# Altium PCB Project.PcbDoc
Units mil, origin at the board's own origin, x right, y up, seen from the top; angles counter-clockwise.
Board outline 5875 x 3940 mil, 2 copper layers (Top Layer, Bottom Layer); 65 components, 62 nets, 293 pads, 34 vias.
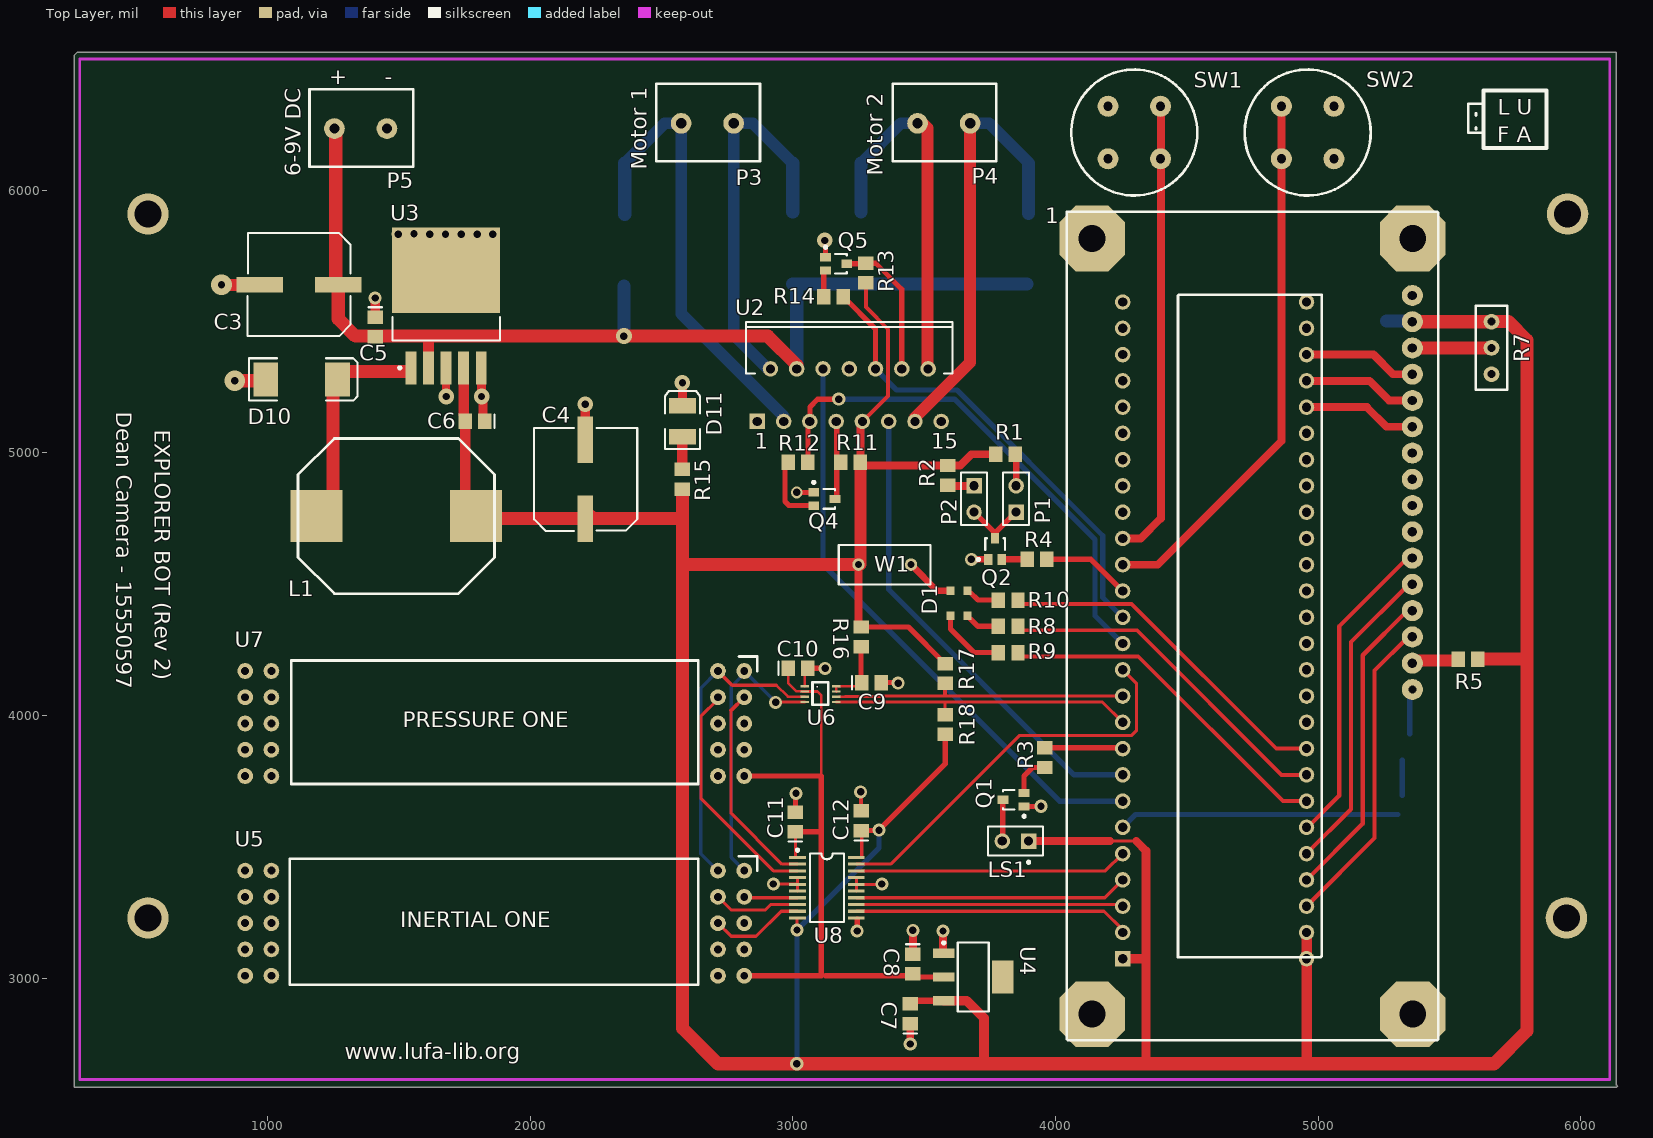
[diagram p0: Top Layer view]
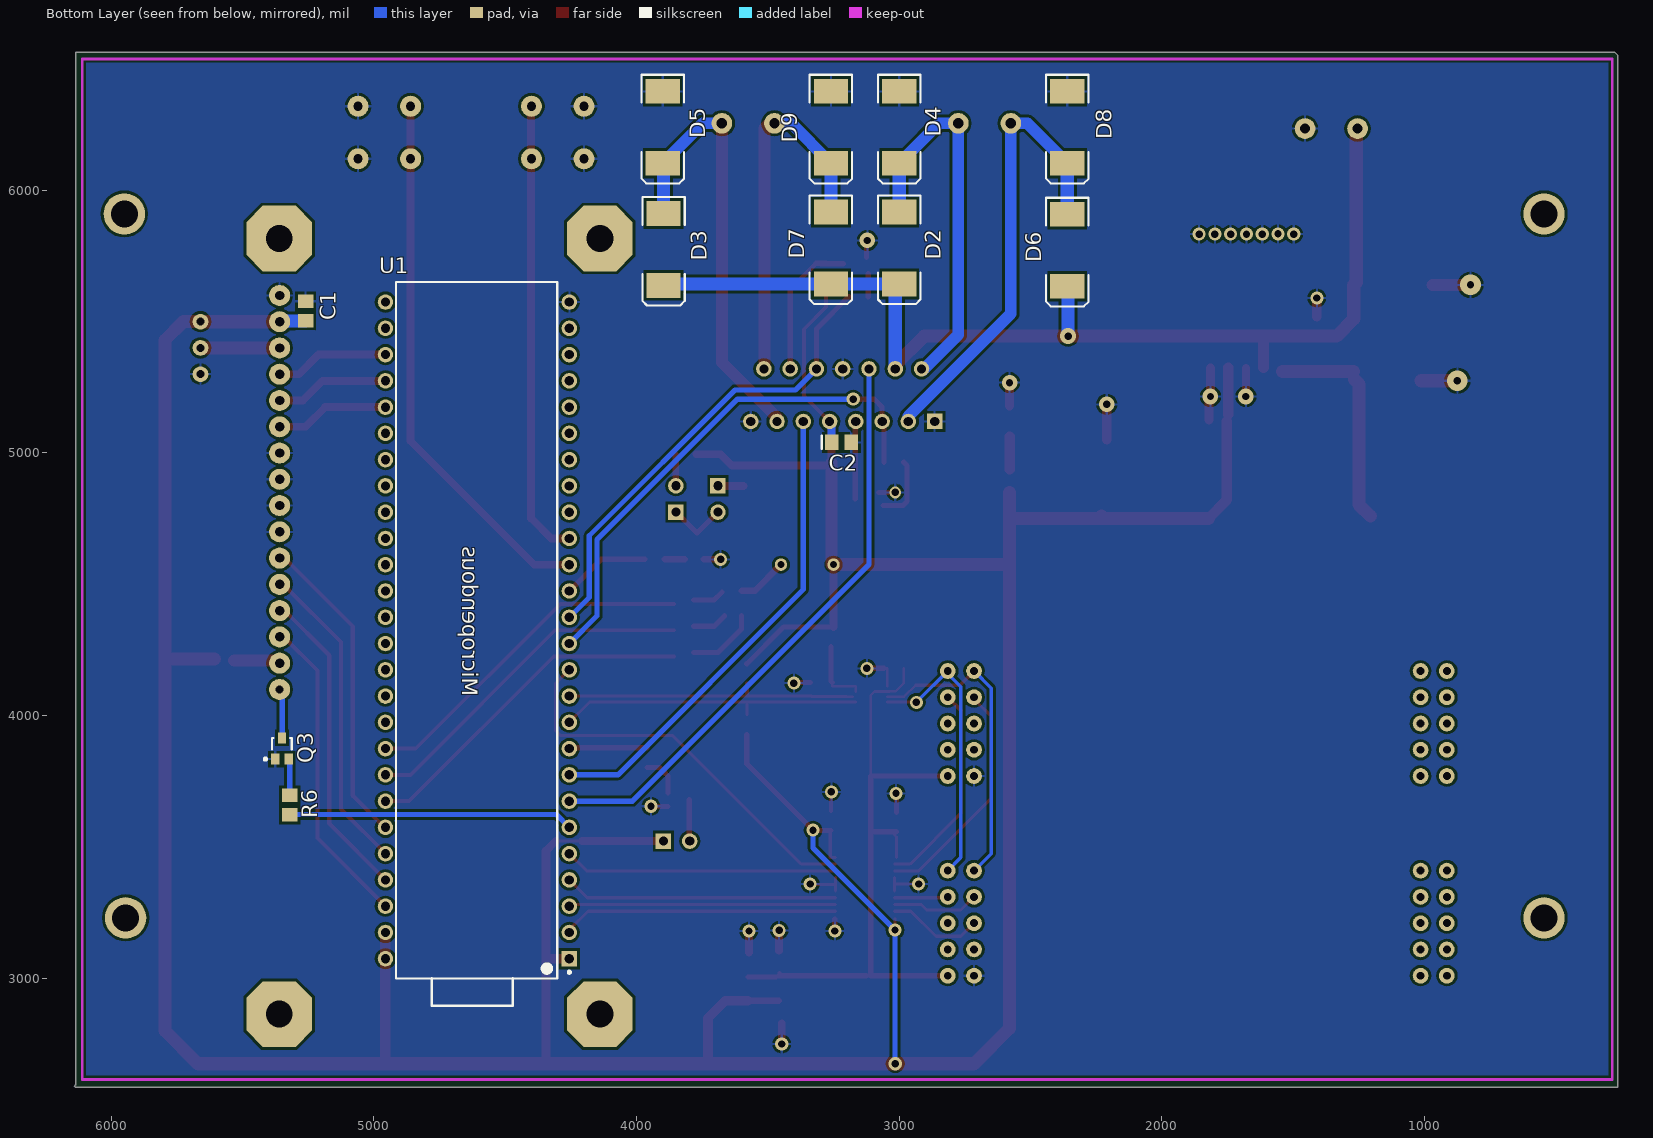
[diagram p1: Bottom Layer view, seen from below]

## Layer stack, top to bottom
Top Layer: signal copper 1.4
Dielectric: dielectric 12.6, FR-4, Dk 4.8
Bottom Layer: signal copper 1.4

## Board outline
265,6515 275,6525 6135,6525 6135,2595 6140,2590 6135,2585 265,2585

## Design rules (kind name [scope] priority, off if disabled: settings)
Clearance [All] p1: gap=10
MinimumSolderMaskSliver [All] p1 off: minsoldermaskwidth=10
PlaneClearance [All] p1: clearance=30
PolygonConnect [All] p1: connectstyle=Relief reliefconductorwidth=10 reliefentries=4 polygonreliefangle="90 Angle"
RoutingVias [All] p1: holewidth=28 width=50 viastyle="Through Hole" minholewidth=28 minwidth=50 maxholewidth=28 maxwidth=50
SilkToSilkClearance [All] p1 off: silktosilkclearance=10
SilkscreenOverComponentPads [All] p1 off: minsilkscreentomaskgap=10
SolderMaskExpansion [All] p1: expansion=4
Width [All] p1: maxlimit=50 minlimit=10 preferedwidth=10
24 further rules are at their usual default settings.

## Classes and differential pairs
component class "System Control": 1 C1 D1 LS1 P1 P2 Q1 Q2 Q3 R1 R2 R3 R4 R5 R6 R7 R8 R9 R10 R? SW1 SW2 SW? U1 W1
component class "Sensor Modules": C9 C10 C11 C12 R16 R17 R18 U5 U6 U7 U8 U9
component class "Power Management": C3 C4 C5 C6 C7 C8 D10 D11 L1 L3 P5 R15 U3 U4
component class "Motor Control": C2 D2 D3 D4 D5 D6 D7 D8 D9 P3 P4 Q4 Q5 R11 R12 R13 R14 U2

## Components (designator, comment, footprint, x,y, rotation, side; value= is the part's Value field where it differs from the comment)
1 "LCD" LCD_PADS 4750,4340 r270 top
C1 "" 2012[0805] 5260,5540 r90 bottom
C2 "" 0805 3220,5040 r180 bottom
C3 "Cap Pol1" "Cap F" 1120,5640 r0 top
C4 "Cap Pol1" "Cap F" 2210,4900 r270 top
C5 "Cap Semi" C0805 1410,5480 r270 top
C6 "Cap Semi" C0805 1790,5120 r180 top
C7 "Cap Semi" C0805 3447,2865 r90 top
C8 "Cap Semi" C0805 3457,3055 r270 top
C9 "" 0805 3300,4126 r0 top
C10 "" 0805 3020,4180 r0 top
C11 "" 0805 3010,3595 r90 top
C12 "" 0805 3260,3600 r90 top
D1 "KAA-3528EMBSGC" KAA-3528EMBSGC 3600,4380 r90 top
D2 "MBRS340T3G" SMC 3000,5780 r270 bottom
D3 "MBRS340T3G" SMC 3897,5775 r270 bottom
D4 "MBRS340T3G" SMC 3000,6240 r270 bottom
D5 "MBRS340T3G" SMC 3900,6240 r270 bottom
D6 "MBRS340T3G" SMC 2360,5771.78 r270 bottom
D7 "MBRS340T3G" SMC 3260,5780 r270 bottom
D8 "MBRS340T3G" SMC 2360,6240 r270 bottom
D9 "MBRS340T3G" SMC 3260,6240 r270 bottom
D10 "MBRS340T3G" SMC 1130,5280 r0 top
D11 "LED3" DSO-C2/D5.6 2580,5120 r90 top
L1 "" inductor_epcos 1490,4760 r0 top
LS1 "Speaker" PIN2 3897.5,3522.5 r180 top
P1 "Header 2" HDR1X2 3850,4775 r90 top
P2 "Header 2" HDR1X2 3690,4875 r270 top
P3 "Motor L" "PCB Screw Connector" 2800,6280 r180 top
P4 "Motor R" "PCB Screw Connector" 3700,6280 r180 top
P5 "Battery" "PCB Screw Connector" 1480,6260 r180 top
Q1 "15C01M-TL-E" SOT323 3840,3680 r90 top
Q2 "15C01M-TL-E" SOT323 3770,4635 r0 top
Q3 "15C01M-TL-E" SOT323 5350,3875 r180 bottom
Q4 "15C01M-TL-E" SOT323 3120,4825 r270 top
Q5 "15C01M-TL-E" SOT323 3165,5720 r270 top
R1 "Res Semi" 2012[0805] 3810,4995 r180 top
R2 "Res Semi" 2012[0805] 3590,4915 r90 top
R3 "Res Semi" 2012[0805] 3960,3840 r270 top
R4 "Res Semi" 2012[0805] 3930,4595 r180 top
R5 "" 2012[0805] 5570,4215 r0 top
R6 "Res Semi" 2012[0805] 5320,3660 r90 bottom
R7 "" POT1 5660,5400 r90 top
R8 "Res Semi" 2012[0805] 3820,4340 r180 top
R9 "Res Semi" 2012[0805] 3820,4240 r180 top
R10 "Res Semi" 2012[0805] 3820,4440 r180 top
R11 "Res Semi" 2012[0805] 3220,4965 r0 top
R12 "Res Semi" 2012[0805] 3020,4965 r0 top
R13 "Res Semi" 2012[0805] 3278,5685 r270 top
R14 "Res Semi" 2012[0805] 3155,5595 r0 top
R15 "Res Semi" 2012[0805] 2580,4900 r270 top
R16 "Res Semi" 2012[0805] 3260,4300 r90 top
R17 "Res Semi" 2012[0805] 3580,4160 r90 top
R18 "Res Semi" 2012[0805] 3580,3966 r270 top
SW1 "PB4" PB2x2 4300,6220 r270 top
SW2 "PB4" PB2x2 4960,6220 r90 top
U1 "Micropendous-4" Micropendous-4 4020,3080 r0 bottom
U2 "L298N" Multiwatt15V 3215,5220 r0 top
U3 "LM2595S-5.0" TS5B_N 1680,5560 r90 top
U4 "ADP3338" SOT223-4l 3687,3005 r0 top
U5 "INTERTIAL-ONE" ATMEL-SENS 2690,3410 r270 top
U6 "PCA9306" us8 3190,4112 r270 top
U7 "PRESSURE-ONE" ATMEL-SENS 2690,4170 r270 top
U8 "ADG3308" TSSOP20 3130,3345 r270 top
W1 "Jumper" RAD-0.2 3350,4575 r180 top

## Footprints (in the part's own frame and the unit in brackets; to place one, negate y for a bottom-side part, rotate by r counter-clockwise, add the part's x,y. Pads: shape width x height; smd on the part's side, far side on the other; paste and mask are expansions set on the pad)
0805 [mm] "Chip Capacitor; Body 2.0 x 1.2 mm (LxW typ)"
  rect 1.3x1.5 smd: 1(-0.95,0) 2(0.95,0)
  silkscreen extent -1.9,-0.65 -1.9,0.65
2012[0805] [mm] "Chip Resistor; Body 2.0 x 1.3 mm (LxW typ)"
  rect 1.3x1.5 smd: 1(-0.95,0) 2(0.95,0)
ATMEL-SENS [mil]
  round 60 hole 30: 1(0,25) 2(0,125) 3(100,25) 4(100,125) 5(200,25) 6(200,125) 7(300,25) 8(300,125) 9(400,25) 10(400,125) 11(0,-1775) 12(0,-1675) 13(100,-1775) 14(100,-1675) 15(200,-1775) 16(200,-1675) 17(300,-1775) 18(300,-1675) 19(400,-1775) 20(400,-1675)
  silkscreen extent -55,105 0,175, body extent -55,-1825 445,175, height 787
C0805 [mm] "Chip Capacitor; Body 2.0 x 1.2 mm (LxW typ)"
  rect 1.3x1.5 smd: 1(-0.95,0) 2(0.95,0)
  silkscreen extent -1.9,-0.65 -1.9,0.65
"Cap F" [mm]
  rect 4.5x1.5 smd: 1(3.8,0) 2(-3.8,0)
  silkscreen extent -4.97,-4.95 5,5.02
DSO-C2/D5.6 [mm] "SM LED; 2 C-Bend Leads; Body 3.5 x 2.8 x 1.9 mm, inc leads (LxWxH typ)"
  rect 1.5x2.6 smd: 1(-1.5,0) 2(1.5,0)
  silkscreen extent -2.65,-1.7 2.95,1.7
HDR1X2 [mm] "Connector; Header; 2 Position"
  rect 1.5x1.5 hole 0.9: 1(0,0)
  round 1.5 hole 0.9: 2(2.54,0)
  silkscreen extent -1.27,-1.27 3.81,1.27
inductor_epcos [mm] "330uH, 1.O Amp DC (Max) Power Inductor"
  rect 5x5 smd: 1(-7.712,0) 2(7.713,0)
  silkscreen extent -9.49,-7.5 9.51,7.5
KAA-3528EMBSGC [mm]
  rect 0.8x0.75 smd: 1(2.413,-1.651) 2(2.413,0) 3(0,0) 4(0,-1.651)
  body extent -0.38,-2.54 2.79,0.89, height 3
LCD_PADS [mm]
  round 2.032 hole 0.9: 1(-32,15.46) 2(-29.459,15.46) 3(-26.919,15.46) 4(-24.379,15.46) 5(-21.839,15.46) 6(-19.299,15.46) 7(-16.759,15.46) 8(-14.219,15.46) 9(-11.679,15.46) 10(-9.139,15.46) 11(-6.599,15.46) 12(-4.059,15.46) 13(-1.519,15.46) 14(1.021,15.46) 15(3.561,15.46)
  round 2.032 hole 0.762: 16(6.101,15.46)
  oct 6.35x6.35 hole 2.6: ""(-37.5,-15.5) ""(-37.5,15.5) ""(37.5,-15.5) ""(37.5,15.5)
  silkscreen extent -40.08,-17.97 40.01,17.97
Micropendous-4 [mm]
  rect 1.5x1.5 hole 0.9: 1(5.988,0.138)
  round 1.5 hole 0.9: 2(5.988,-2.402) 3(5.988,-4.942) 4(5.988,-7.482) 5(5.988,-10.022) 6(5.988,-12.562) 7(5.988,-15.102) 8(5.988,-17.642) 9(5.988,-20.182) 10(5.988,-22.722) 11(5.988,-25.262) 12(5.988,-27.802) 13(5.988,-30.342) 14(5.988,-32.882) 15(5.988,-35.422) 16(5.988,-37.962) 17(5.988,-40.502) 18(5.988,-43.042) 19(5.988,-45.582) 20(5.988,-48.122) 21(5.988,-50.662) 22(5.988,-53.202) 23(5.988,-55.742) 24(5.988,-58.282) 25(5.988,-60.822) 26(5.988,-63.362) 27(23.768,-63.362) 28(23.768,-60.822) 29(23.768,-58.282) 30(23.768,-55.742) 31(23.768,-53.202) 32(23.768,-50.662) 33(23.768,-48.122) 34(23.768,-45.582) 35(23.768,-43.042) 36(23.768,-40.502) 37(23.768,-37.962) 38(23.768,-35.422) 39(23.768,-32.882) 40(23.768,-30.342) 41(23.768,-27.802) 42(23.768,-25.262) 43(23.768,-22.722) 44(23.768,-20.182) 45(23.768,-17.642) 46(23.768,-15.102) 47(23.768,-12.562) 48(23.768,-10.022) 49(23.768,-7.482) 50(23.768,-4.942) 51(23.768,-2.402) 52(23.768,0.138)
  silkscreen extent 5.86,-65.31 22.73,2.03, body extent 6.18,-65.26 23.49,2.04, height 4.45
Multiwatt15V [mm] "TO, Thru-Hole, Vertical, Heatsink Mounted; 15 Bent Staggered Leads; Pitch 1.27 mm"
  rect 1.5x1.5 hole 0.9: 1(-8.89,-2.54)
  round 1.5 hole 0.9: 2(-7.62,2.54) 3(-6.35,-2.54) 4(-5.08,2.54) 5(-3.81,-2.54) 6(-2.54,2.54) 7(-1.27,-2.54) 8(0,2.54) 9(1.27,-2.54) 10(2.54,2.54) 11(3.81,-2.54) 12(5.08,2.54) 13(6.35,-2.54) 14(7.62,2.54) 15(8.89,-2.54)
  silkscreen extent -10,2.09 10,7.09
PB2x2 [mil]
  round 80 hole 35: 1(100,100) 2(-100,100) 3(-100,-100) 4(100,-100)
  silkscreen extent -240,-240 240,240
"PCB Screw Connector" [mm]
  round 2 hole 1: 1(0.635,0.635) 2(5.715,0.635)
  silkscreen extent -1.91,-3.18 8.13,4.32
PIN2 [mm] "Photosensitive Diode; 2 Leads"
  rect 1.5x1.5 hole 0.9: 1(0,0)
  round 1.5 hole 0.9: 2(2.54,0)
  silkscreen extent -1.4,-1.4 3.94,2.17
POT1 [mil]
  round 60 hole 30: 1(-100,0) 2(100,0) 3(0,0)
  silkscreen extent -160,-60 160,60
RAD-0.2 [mm] "Radial Cap, Thru-Hole; 2 Leads; 0.2 in Pin Spacing"
  round 1.2 hole 0.7: 1(-2.54,0) 2(2.54,0)
  silkscreen extent -4.44,-1.91 4.44,1.91
SMC [mm]
  rect 2.4x3.3 smd: 1(-3.475,0) 2(3.475,0)
  silkscreen extent -5.07,-2.05 5.43,2.06
SOT223-4l [mm] "SOT223, 4-Leads, Body 6.5x3.5mm, Pitch 2.3mm, Lead Span 7mm, IPC High Density"
  rect 2.1x0.9 smd: 1(-2.85,2.3) 2(-2.85,0) 3(-2.85,-2.3)
  rect 2.1x3.2 smd: 4(2.85,0)
  silkscreen extent -2.97,-3.35 1.5,3.42, body extent -1.85,-3.35 1.85,3.35, height 1.7
SOT323 [mm] "SOT-323/SC-70; 3 Leads; Body 2.2 x 2.2 mm, inc. leads (LxW max)"
  rect 0.8x1.05 smd: 1(-0.65,-1.025) 2(0.65,-1.025) 3(0,1.025)
  silkscreen extent -1.72,-1.15 0.95,1.03
TS5B_N [mm] "D2-PAK, 6-Leads, Body 8.6x10.2mm, Pitch 1.7mm, Lead Span 14.1mm, IPC Medium Density"
  rect 3.2x1.05 smd: 1(-6,3.4) 2(-6,1.7) 3(-6,0) 4(-6,-1.7) 5(-6,-3.4)
  rect 8.3x10.45 smd: 6(3.45,0)
  silkscreen extent -6.12,-5.2 -1.1,5.2, body extent -3.35,-5.2 6.05,5.2, height 4.65
TSSOP20 [mm] "Shrink Small Outline; 20 Leads; Body Width 4.4 mm; Pitch 0.65 mm"
  rect 0.3x1.6 smd: 1(-2.925,-2.85) 2(-2.275,-2.85) 3(-1.625,-2.85) 4(-0.975,-2.85) 5(-0.325,-2.85) 6(0.325,-2.85) 7(0.975,-2.85) 8(1.625,-2.85) 9(2.275,-2.85) 10(2.925,-2.85) 11(2.925,2.85) 12(2.275,2.85) 13(1.625,2.85) 14(0.975,2.85) 15(0.325,2.85) 16(-0.325,2.85) 17(-0.975,2.85) 18(-1.625,2.85) 19(-2.275,2.85) 20(-2.925,2.85)
  silkscreen extent -3.75,-2.97 3.3,1.65
us8 [mm]
  rect 0.21x0.8 smd: 1(0,-3.683) 2(0.508,-3.683) 3(1.016,-3.683) 4(1.524,-3.683) 5(1.524,-0.635) 6(1.016,-0.635) 7(0.508,-0.635) 8(0,-0.635)
  silkscreen extent -0.38,-2.92 1.78,-1.4

## Part data
C1 C2 C9 C10 C11 C12: library part "Cap Semi", "Capacitor (Semiconductor SIM Model)"
C3 C4: "Polarized Capacitor (Radial)"
C5 C6 C7 C8: "Capacitor (Semiconductor SIM Model)"
D1: library part S1204RGBSDJC, "Ultra-Bright RGB Tri-color LED Lamp, 4-Lead 1204-size SMD"
D2 D3 D4 D5 D6 D7 D8 D9 D10: library part "D Schottky", "Schottky Diode"
D11: "Typical BLUE SiC LED"
L1: library part Inductor, "Inductor"
LS1: "Loudspeaker"
P1 P2: "Header, 2-Pin"
P3 P4 P5: library part "Header 2", "Header, 2-Pin"
Q1 Q2 Q3 Q4 Q5: library part 2N3904, "NPN General Purpose Amplifier"
R1 R2 R3 R4 R6 R8 R9 R10 R11 R12 R13 R14 R15 R16 R17 R18: "Semiconductor Resistor"
R5: library part Res1, "Resistor"
R7: library part RPot, "Potentiometer"
U2: "Dual Full Bridge Driver"
U3: "SIMPLE SWITCHER Power Converter 150 KHz 1A Step-Down Voltage Regulator"
W1: "Jumper Wire"

## Free pads (board coordinates)
  round 157.48 hole 102.36: 1(545,3230) 1(545,5910) 1(5945,3230) 1(5950,5910)

## Via types
v1: diameter 50, hole 28, Top Layer to Bottom Layer, 25 vias
v2: diameter 59.06, hole 28, Top Layer to Bottom Layer, 5 vias
v3: diameter 78.74, hole 28, Top Layer to Bottom Layer, 2 vias
v4: diameter 45, hole 28, Top Layer to Bottom Layer, 1 vias
v5: diameter 60, hole 28, Top Layer to Bottom Layer, 1 vias

## Nets (pads, with @x,y where several pads share a name; then routed paths per layer and width w, separated by ;. In a path a pad name is that pad's centre, name@x,y a point inside that pad or via, vN(x,y) a via of type N, cw(c..) or ccw(c..) an arc to the next point about the centre after c; other vN are vias at no path point)
3.3V: C8.2 C10.1 C11.1 U4.2 U5.10 U6.2 U7.10 U8.1 | length 2514.2
  Top Layer w10: C10.1 2982.6,4124.4 3014.13,4092.87 3035.85,4092.87 3036.72,4092 3094,4092 3108,4078 3108,3770 ; U6.2@3053.28,4092 U6.2@3054.15,4092.87
  Top Layer w12: U8.1@3010,3460 3010,3537.6 C11.1@3017.8,3545.39
  Top Layer w14: U7.10@2815,3750 U7.10@2835,3770 ; C8.2 3452.2,3017.6 3454.6,3020 C8.2@3457,3020
  Top Layer w16: U5.10 U5.10@2830,3010
  Top Layer w20: U5.10 3108,3010 3108,3557.6 ; U7.10@2835,3770 3108,3770 3108,3557.6 ; C11.1 3108,3557.6 ; 3124,3010 C8.2@3457,3010 ; C8.2@3469.6,3005 U4.2
5V: 1.2 C1.1 C2.1 C4.1 C6.2 C7.2 C12.1 L1.2 LS1.1 R1.2 R2.2 R5.2 R7.2 R11.2 R13.2 R15.2 R16.2 R17.2 R18.2 U1.1 U1.51 U1.52 U2.9 U3.4 U4.3 U8.10 U8.20 W1.2 | length 17175.3
  Top Layer w12: v1(3016,3184) U8.10@3016,3228.05 ; U8.20 3262.6,3460.16 C12.1@3262.6,3560 ; 4207.5,3522.5 4307.5,3522.5
  Top Layer w15: U2.9 3362.03,5217.03 3362.03,5470.97 3278,5555 R13.2
  Top Layer w20: R16.2@3250,4337.4 3440,4337.4 R17.2 ; C12.1 v1@3326.6,3562.6 ; v1(3327.98,3563.98) 3580,3816 R18.2
  Top Layer w25: C7.2@3459.05,2914.45 U4.3
  Top Layer w30: R16.2@3250,4337.4 W1.2 ; R11.2 U2.9@3257.4,5112.4 ; R11.2@3270,4952.4 3637.4,4952.4 3680,4995 R1.2 ; LS1.1 4207.5,3522.5 ; 4307.5,3522.5 4345,3485
  Top Layer w35: U4.3 3662.55,2914.45 ; U1.1 4345,3074.57 ; 4345,2675 4345,3074.57 ; 4345,3485 4345,3074.57
  Top Layer w37: 3662.55,2914.45 3728,2849 3728,2675
  Top Layer w40: C6.2@1746.93,5148.07 U3.4 ; C6.2 1752.6,4821.04 L1.2@1823.64,4750 ; 2570,4747.8 2580,4747.8 ; 4955.75,2675.75 U1.52 U1.51
  Top Layer w45: W1.2@3257.4,4575 R11.2
  Top Layer w50: L1.2@1823.64,4750 2220,4750 C4.1@2230,4760 ; C4.1@2230,4750.39 2580,4750.39 ; R15.2@2580,4850 2580,4750.39 ; W1.2 2580,4575 ; 1.2@5365.91,5492.56 1.2 R7.2@5660,5499.8 ; R5.2 5795,4215 ; R7.2 5725,5500 5795,5430 5795,4215 ; 2580,4575 2580,4747.8 2580,4750.39 ; 2580,4575 2580,2810 2715,2675 v1(3015,2675) 3728,2675 4345,2675 5670,2675 5795,2800 5795,4215
  Bottom Layer w15: v1(3015,2675) v1@3016,2676
  Bottom Layer w20: v1@3016,2676 v1(3016,3184) 3327.98,3495.98 v1(3327.98,3563.98)
  Bottom Layer w30: C2.1 U2.9@3257.4,5112.4
  Bottom Layer w50: C1.1 1.2@5355.87,5502.6
GND: 1.1 1.7 1.8 1.9 1.10 C1.2 C2.2 C3.2 C4.2 C5.1 C6.1 C7.1 C8.1 C9.2 C10.2 C11.2 C12.2 D4.1 D5.1 D8.1 D9.1 D10.1 D11.2 P5.1 Q1.1 Q2.1 Q3.1 Q4.1 Q5.1 R7.1 SW1.3 SW1.4 SW2.3 SW2.4 U1.26 U2.1 U2.8 U2.15 U3.3 U3.5 U3.6 U4.1 U5.9 U6.1 U7.9 U8.4 U8.5 U8.6 U8.11 U8.15 U8.16 U8.17 | length 2043.4
  Top Layer w10: U6.1 C10.2@3045,4180
  Top Layer w12: v1(2926,3359) U8.5@3016.59,3359 ; U8.6 U8.5 U8.4 ; U8.15 U8.16 ; U8.17 U8.16 ; v1@3339,3357.8 U8.16
  Top Layer w15: C12.2 v1@3260,3708
  Top Layer w20: v1@3003,3703.4 3003,3695 3010,3688 C11.2 ; v4(3015,4850) Q4.1@3079.06,4850 ; C10.2 v1(3123,4180) ; Q5.1 v2@3124.65,5805.35 ; v1(3245,3180) U8.11@3245,3225.64 ; C9.2 v1@3399,4126 ; Q1.1 v1@3944.41,3654.41
  Top Layer w25: v1(3680,4595) Q2.1@3744.06,4595
  Top Layer w30: v2(1680,5215) U3.3 ; v1(3447,2750) C7.1 ; C8.1@3457,3105 v1(3457,3182.6) ; U4.1@3572,3098.35 v1(3572,3180)
  Top Layer w35: C5.1 v1(1410,5590) ; v2@1815,5210 v2(1815,5215) U3.5@1815,5322.64 ; C6.1@1820,5125 v2@1820,5217.6 ; C4.2 v2(2210,5185) ; D11.2 v2(2580,5268)
  Top Layer w45: v3(825,5640) C3.2
  Top Layer w50: v3@890,5275 D10.1@1013.19,5275
  other v1: 3339,3359 3945,3655 3012,3704 3258,3710 3401,4124 1498,5833 1618,5833 1678,5833 1738,5833 1798,5833 1858,5833 1558,5834
  other v2: 3121,5809
  other v3: 875,5275
Net1_3: 1.3 R7.3 | length 301.1
  Top Layer w50: 1.3@5358.86,5400 R7.3
Net1_4: 1.4 U1.29 | length 433.9
  Top Layer w30: U1.29 5210.43,5374.57 5285.2,5299.8 1.4
Net1_5: 1.5 U1.30 | length 433.9
  Top Layer w30: U1.30 5195.43,5274.57 5270.2,5199.8 1.5
Net1_6: 1.6 U1.31 | length 433.9
  Top Layer w30: U1.31 5185.43,5174.57 5260.2,5099.8 1.6
Net1_11: 1.11 U1.47 | length 1204.3
  Top Layer w16: U1.47@4957.66,3572.66 5080,3695 5080,4340 5339.8,4599.8 1.11
Net1_12: 1.12 U1.48 | length 1200.2
  Top Layer w16: U1.48 5125,3643.82 5125,4280 5344.8,4499.8 1.12
Net1_13: 1.13 U1.49 | length 1203.2
  Top Layer w16: U1.49 5170,3588.82 5170,4230 5339.8,4399.8 1.13
Net1_14: 1.14 U1.50 | length 1201.4
  Top Layer w16: U1.50 5215,3533.82 5215,4172 5342.8,4299.8 1.14
Net1_15: 1.15 R5.1 | length 173.9
  Top Layer w45: 1.15@5358.66,4209.8 R5.1@5532.6,4209.8
Net1_16: 1.16 Q3.3 | length 337.8
  Bottom Layer w20: Q3.3@5348.66,3930.91 5348.66,4099.8 Q3.3@5348.66,3930.91
NetC9_1: C9.1 R16.1 U6.7 U6.8 | length 262.4
  Top Layer w10: U6.7 U6.8 3254.6,4112 C9.1@3254.6,4126
  Top Layer w20: C9.1@3254.6,4126 3260,4131.4 R16.1
NetD1_1: D1.1 R10.2 | length 120
  Top Layer w20: D1.1@3675,4470 3705,4440 R10.2
NetD1_2: D1.2 W1.1 | length 191.4
  Top Layer w25: W1.1 3550,4475 D1.2
NetD1_3: D1.3 R9.2 | length 269.9
  Top Layer w20: D1.3 3600,4330 3690,4240 R9.2
NetD1_4: D1.4 R8.2 | length 134.2
  Top Layer w20: D1.4 3705,4340 R8.2
NetD2_1: D2.1 D4.2 P3.1 U2.2 | length 1470.2
  Bottom Layer w45: U2.2@2910,5315 2775,5450 P3.1 2848.19,6255 D4.2
  Bottom Layer w50: D2.1 D4.2
NetD3_1: D3.1 D5.2 P4.1 U2.13 | length 1678.2
  Top Layer w45: U2.13 3465,5135 3675,5345 P4.1@3675,6235
  Bottom Layer w45: P4.1 3748.19,6255 D5.2
  Bottom Layer w50: D3.1 D5.2@3897,6100.19
NetD6_1: D6.1 D8.2 P3.2 U2.3 | length 1767.3
  Bottom Layer w35: U2.3 U2.3@2965,5140
  Bottom Layer w45: D8.2 2511.81,6255 2572,6255 2575,6252 2575,5530 U2.3@2965,5140
  Bottom Layer w50: D6.1 D8.2
NetD7_1: D7.1 D9.2 P4.2 U2.14 | length 1409.6
  Top Layer w45: P4.2@3495,6255 3513,6237 3513,5327 U2.14@3520,5320
  Bottom Layer w45: D9.2 3411.81,6255 P4.2
  Bottom Layer w50: D7.1 D9.2
NetD10_2: D10.2 L1.1 U3.1 | length 815
  Top Layer w50: L1.1@1206.36,4760 1250,4803.64 1250,5263.19 D10.2 ; D10.2@1270,5310 U3.1@1540,5310
NetD11_1: D11.1 R15.1 | length 123.5
  Top Layer w40: R15.1 D11.1
NetLS1_2: LS1.2 Q1.3 | length 158.4
  Top Layer w20: LS1.2 3799.65,3524.65 Q1.3
NetP1_1: P1.1 P2.2 Q2.3 | length 226.3
  Top Layer w20: P2.2 3770,4695 P1.1
NetP1_2: P1.2 R1.1 | length 117.4
  Top Layer w25: P1.2 R1.1@3850,4992.4
NetP2_1: P2.1 R2.1 | length 97.4
  Top Layer w30: R2.1@3592.6,4875 P2.1
NetQ1_2: Q1.2 R3.2 | length 157.8
  Top Layer w20: Q1.2 3880.35,3770.35 3912.6,3802.6 R3.2
NetQ2_2: Q2.2 R4.2 | length 76.7
  Top Layer w25: 3815.94,4595 R4.2
NetQ3_2: Q3.2 R6.2 | length 132.8
  Bottom Layer w20: R6.2 Q3.2@5320,3830.24
NetQ4_2: Q4.2 R12.1 | length 251.8
  Top Layer w20: R12.1 2970,4952.4 2970,4815 2985,4800 Q4.2@3060.35,4800
NetQ4_3: Q4.3 R11.1 U2.7 | length 295.9
  Top Layer w20: U2.7 3167.24,5117.76 3167.24,4965 Q4.3@3167.24,4825
NetQ5_2: Q5.2 R14.1 | length 87.7
  Top Layer w20: R14.1 3117.76,5595.16 Q5.2@3117.76,5682.6
NetQ5_3: Q5.3 R13.1 U2.12 | length 569.9
  Top Layer w20: Q5.3@3212.24,5720 R13.1@3297.6,5720 ; R13.1@3275.6,5720 R13.1 3315.6,5722.4 3415,5623 U2.12
NetR3_1: R3.1 U1.9 | length 296.9
  Top Layer w20: R3.1 4252.91,3877.4 U1.9
NetR4_1: R4.1 U1.15 | length 338.2
  Top Layer w20: R4.1 4135.31,4595 U1.15
NetR6_1: R6.1 U1.6 | length 1068.4
  Bottom Layer w19.68: U1.6 4305.12,3623.94 R6.1@5303.66,3623.94
NetR8_1: R8.1 U1.45 | length 1326.3
  Top Layer w15: R8.1@3857.4,4325 4310,4325 4860.43,3774.57 U1.45
NetR9_1: R9.1 U1.46 | length 1326.3
  Top Layer w15: R9.1@3857.4,4225 4315,4225 4865.43,3674.57 U1.46
NetR10_1: R10.1 U1.44 | length 1326.3
  Top Layer w15: R10.1@3857.4,4425 4290,4425 4840.43,3874.57 U1.44
NetR12_2: R12.2 U1.13 U2.5 | length 1971.4
  Top Layer w20: R12.2 3057.4,5112.4 U2.5 3065,5175 3095,5205 v1(3175,5205)
  Bottom Layer w20: v1(3175,5205) 3615,5205 4150,4670 4150,4380.31 U1.13
NetR14_2: R14.2 U1.14 U2.10 | length 1795.6
  Top Layer w20: R14.2 3315,5472.4 U2.10
  Bottom Layer w20: U2.10 3395,5240 3625,5240 4180,4685 4180,4450.31 U1.14
NetR17_1: R17.1 U1.11 U6.6 | length 1127.5
  Top Layer w10: U6.6@3176.25,4072 3198,4072 3198.87,4072.87 3320.03,4072.87 3320.17,4073 3332.25,4073 3332.25,4074.57
  Top Layer w12: 3332.25,4074.57 U1.11
  Top Layer w15: 3580,4076.57 R17.1
NetR18_1: R18.1 U1.10 U6.5 | length 1167
  Top Layer w10: U6.5 3328.87,4052
  Top Layer w12: 3328.87,4052 4178.31,4052 U1.10 ; R18.1 3580,4047.61
NetSW1_1: SW1.1 SW1.2 U1.17 | length 1745.9
  Top Layer w30: U1.17 4324.57,4674.57 4401,4751 SW1.2@4401,6320
NetSW2_1: SW2.1 SW2.2 U1.16 | length 2074.1
  Top Layer w30: U1.16 4389.57,4574.57 4860,5045 SW2.2 SW2.1
NetU1_2: U1.2 U8.12 | length 1052.7
  Top Layer w12: U8.12 4184.57,3255.43 4255.75,3184.25 U1.2
NetU1_3: U1.3 U8.13 | length 1016.2
  Top Layer w12: U8.13 4249.29,3281.02 U1.3
NetU1_4: U1.4 U8.14 | length 1041.7
  Top Layer w12: U8.14 4187.8,3306.61 U1.4
NetU1_5: U1.5 U8.18 | length 1040.7
  Top Layer w12: U8.18 4190.16,3408.98 U1.5
NetU1_7: U1.7 U2.6 | length 2258.7
  Bottom Layer w20: U2.6 3115,4575 4015.43,3674.57 U1.7
NetU1_8: U1.8 U2.11 | length 1822.9
  Bottom Layer w20: U2.11 3365,4480 4070.43,3774.57 U1.8
NetU1_12: U1.12 U8.19 | length 1530.4
  Top Layer w12: U8.19 3372.57,3434.57 3862,3924 4289,3924 4309,3944 4309,4121.31 U1.12
NetU5_1: U5.1 U6.3 U7.1 | length 1194.4
  Top Layer w10: 2936.5,4116.5 2981,4072 U6.3
  Top Layer w13: U5.1 U5.1@2725,3410 ; U7.1 2768.5,4116.5 2936.5,4116.5
  Bottom Layer w13: U5.1 2650,3475 2650,4105 U7.1
NetU5_2: U5.2 U6.4 U7.2 | length 1090.7
  Top Layer w10: v1(2934.39,4050.61) 2945.5,4039.5 2958,4052 U6.4
  Top Layer w13: v1@2931,4054 v1(2934.39,4050.61)
  Bottom Layer w13: U5.2 2765,3460 2765,4110 2815,4160 U7.2 v1@2931,4054
NetU5_3: U5.3 U8.8 | length 332.2
  Top Layer w12: U5.3 2765,3260 2895,3260 2916.02,3281.02 U8.8
NetU5_4: U5.4 U8.7 | length 199.4
  Top Layer w12: U5.4@2818.39,3306.61 U8.7
NetU5_5: U5.5 U8.9 | length 363
  Top Layer w12: U5.5 2765,3160 2860,3160 2955.43,3255.43 U8.9
NetU7_3: U7.3 U8.3 | length 894.1
  Top Layer w12: U7.3 2715,4062 2650,3997 2650,3685 2926.02,3408.98 U8.3
NetU7_4: U7.4 U8.2 | length 795.6
  Top Layer w12: 2765,4020 2765,3628 2958.43,3434.57 U8.2
  Top Layer w14: 2765,4020 U7.4
VBAT: C3.1 C5.2 D2.2 D3.2 D6.2 D7.2 P5.2 U2.4 U3.2 | length 4080.6
  Top Layer w40: U3.2 1613.07,5445
  Top Layer w45: U2.4 U2.4@3015,5335
  Top Layer w50: C3.1@1260,5649.61 P5.2@1260,6235 ; C3.1 1269.61,5510.39 1335,5445 1613.07,5445 v5(2357,5445) 2905,5445 U2.4@3015,5335
  Bottom Layer w50: v5(2357,5445) D6.2@2357,5634.97 ; U2.4 3015,5628.19 D2.2 D7.2 D3.2@3892,5643.19
pads on no net: 1. U1.18 U1.19 U1.20 U1.21 U1.22 U1.23 U1.24 U1.25 U1.27 U1.28 U1.32 U1.33 U1.34 U1.35 U1.36 U1.37 U1.38 U1.39 U1.40 U1.41 U1.42 U1.43 U4.4 U5.6 U5.7 U5.8 U5.11 U5.12 U5.13 U5.14 U5.15 U5.16 U5.17 U5.18 U5.19 U5.20 U7.5 U7.6 U7.7 U7.8 U7.11 U7.12 U7.13 U7.14 U7.15 U7.16 U7.17 U7.18 U7.19 U7.20

## Polygon pours and split planes (outlines as drawn)
GND on Bottom Layer "Bottom Layer-No Net" (solid, pour order 1000): 280.05,6505 6100.03,6505 6100.03,2615 285,2615

## Keep-outs
Keep-Out Layer:
  lines w10: 285,2615 6110,2615 6110,6500 285,6500 285,2615

## Silkscreen, mask and mechanical layers (free items; w line width, h text height)
Top Overlay:
  lines w10: 5601,6232 5601,6239 ; 5601,6285 5601,6293 ; 5630,6219 5571,6219 5571,6230.5 5571,6285.5 5571,6329 5630,6329 ; 1085,2975 2640,2975 2640,3455 1085,3455 1085,2975 ; 1090,3740 2640,3740 2640,4210 1090,4210 1090,3740
  lines w15: 5630,6161 5630,6380 5870,6380 5870,6161 5630,6161
  text "+" at 1236,6404 h60
  text "-" at 1446,6404 h60
  text "L U" at 5683,6288 h60
  text "F A" at 5681,6183 h60
  text "Motor 1" at 2443,6078 h60 r90
  text "Motor 2" at 3343,6056 h60 r90
  text "6-9V DC" at 1126,6053 h60 r90
  text "Dean Camera - 15550597" at 424,5157 h60 r270
  text "EXPLORER BOT (Rev 2)" at 571,5089 h60 r270
  text "PRESSURE ONE" at 1515,3955 h60
  text "INERTIAL ONE" at 1505,3195 h60
  text "www.lufa-lib.org" at 1295,2692 h60
Bottom Overlay:
  lines w10: 4471,3000 4471,2895 4548.25,2895 4702.75,2895 4780,2895 4780,3000
  text "Micropendous" at 4663,4073 h60 r90

## Text inside footprints (layer, text, board x,y; h text height)
U2: Top Overlay "15" at 3527.6,5016.65 h59.06; Top Overlay "1" at 2855.94,5016.65 h59.06